# Altium PCB FootSW.PcbDoc
Units mil, origin at the board's own origin, x right, y up, seen from the top; angles counter-clockwise.
Board outline 6141.73 x 1062.99 mil, 2 copper layers (Top Layer, Bottom Layer); 4 components, 6 nets, 30 pads, 0 vias.
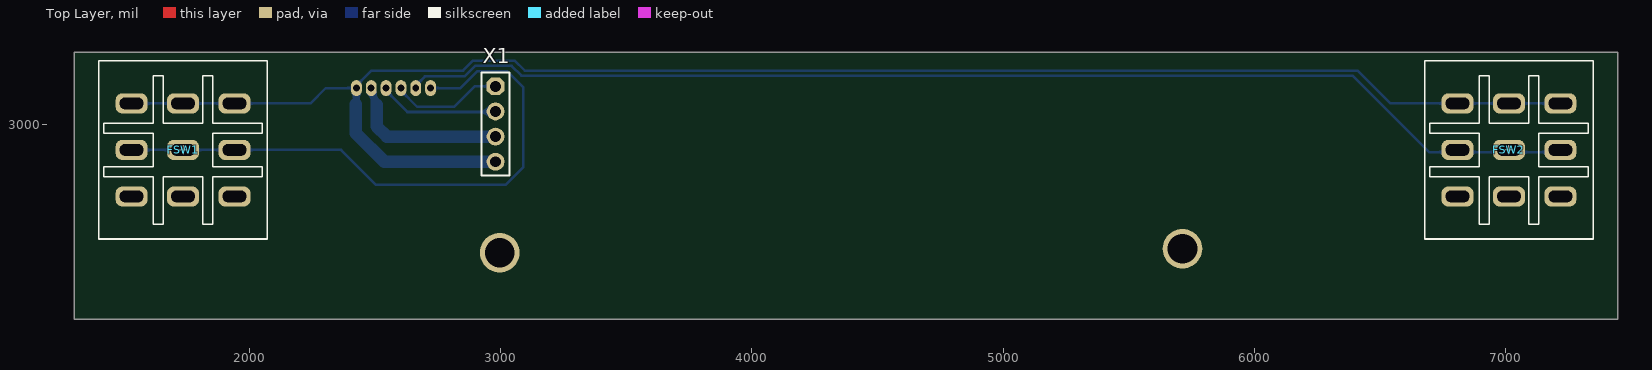
[diagram p0: Top Layer view]
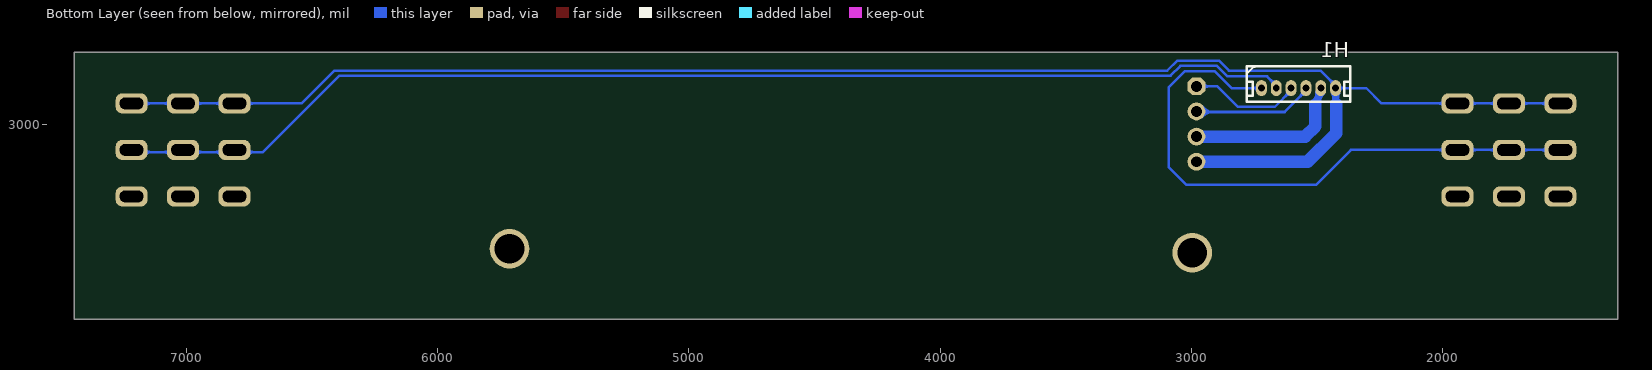
[diagram p1: Bottom Layer view, seen from below]
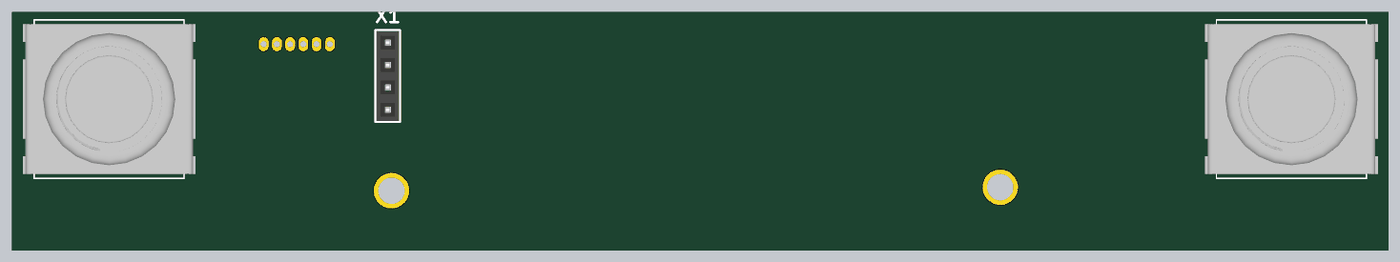
[diagram p2: 3D render of the assembled board from above, using the file's embedded part models]

## Layer stack, top to bottom
Top Solder: solder mask 0.4, Solder Resist, Dk 3.5
Top Layer: signal copper 1.4
Dielectric 1: dielectric 12.6, FR-4, Dk 4.8
Bottom Layer: signal copper 1.4
Bottom Solder: solder mask 0.4, Solder Resist, Dk 3.5

## Board outline
1304.13,2225 1304.13,3287.99 7445.87,3287.99 7445.87,2225

## Design rules (kind name [scope] priority, off if disabled: settings)
Clearance [All] p1: gap=10 ignorepadtopadclearanceinfootprint=FALSE except(0: Arc-Hole Track-Hole SMDPad-Hole THPad-Hole Via-Hole Fill-Hole Poly-Hole Region-Hole Text-Hole)
PolygonConnect [All] p1: connectstyle=Relief reliefconductorwidth=10 reliefentries=4 polygonreliefangle="90 Angle" airgapwidth=10
RoutingVias [All] p1: holewidth=28 width=50 viastyle="Through Hole" minholewidth=28 minwidth=50 maxholewidth=28 maxwidth=50
SolderMaskExpansion [All] p1: expansion=4 istentingtop=FALSE
Width [All] p1: maxlimit=50 minlimit=10 preferedwidth=10
30 further rules are at their usual default settings.

## Components (designator, comment, footprint, x,y, rotation, side; value= is the part's Value field where it differs from the comment)
FSW1 "FootSwitch" FOOTSW 1532.48,3084.05 r270 top
FSW2 "FootSwitch" FOOTSW 6808.07,3084.05 r270 top
H1 "1.5-6A" 1.5-6A 2722.16,3145 r180 bottom
X1 "Connector, 4pin, 2.54mm, 500VAC, 3A" "CON: PBS-4" 2980.54,3002.11 r270 top

## Footprints (in the part's own frame and the unit in brackets; to place one, negate y for a bottom-side part, rotate by r counter-clockwise, add the part's x,y. Pads: shape width x height; smd on the part's side, far side on the other; paste and mask are expansions set on the pad)
1.5-6A [mm] "Pin Header p=1.5mm, 6 pins"
  oval 1.1x1.6 hole 0.7: 1(0,0) 2(1.5,0) 3(3,0) 4(4.5,0) 5(6,0) 6(7.5,0)
  silkscreen extent -1.52,-1.4 9,2.2, body extent -1.4,-1.3 8.9,2.1, height 6
"CON: PBS-4" [mm] "PBS-5"
  oct 1.8x1.8 hole 1.1: 1(-3.81,0)
  round 1.8 hole 1.1: 2(-1.27,0) 3(1.27,0) 4(3.81,0)
  silkscreen extent -5.23,-1.4 5.2,1.4, body extent -5.08,-1.27 5.08,1.27, height 8.4
FOOTSW [mm]
  rrect60% 2x3.2 hole 1.2 slot 2.4 at 90 deg: 1(0,0) 2(4.7,0) 3(9.4,0) 4(0,5.2) 5(4.7,5.2) 6(9.4,5.2) 7(0,10.4) 8(4.7,10.4) 9(9.4,10.4)
  silkscreen extent -4.3,-3.3 13.7,13.7, body extent -3.81,-4.59 13.19,15.01, height 39.54

## Part data
H1: "Pin Header p=1.5mm, 6 pins"
X1: library part PBS-4, CurrentMax=3A, Manufacturer=Connfly, VoltageMax=500VAC, CommentText="\"Разъем\"", helpurl=https://www.chipdip.ru/product/pbs-4, Multichannel=4pin, PartNumber=PBS-4, Pitch=2.54mm, TypeConnector=Connector, ValueManufacturerPartNumber="Connector, 4pin, 2.54mm, 500VAC, 3A"

## Free pads (board coordinates)
  round 157.48 hole 118.11: 1(2997.25,2490.38) 1(5713.75,2505.98)

## Nets (pads, with @x,y where several pads share a name; then routed paths per layer and width w, separated by ;. In a path a pad name is that pad's centre, name@x,y a point inside that pad or via, vN(x,y) a via of type N, cw(c..) or ccw(c..) an arc to the next point about the centre after c; other vN are vias at no path point)
+5: H1.5 X1.3 | length 664.7
  Bottom Layer w25: H1.5@2491.51,3128.77 2491.51,3139.43 H1.5 2485.95,3135.16 2507.17,3077.83
  Bottom Layer w50: 2507.17,3077.83 2507.17,2992.83 2547.89,2952.11 X1.3
FOOT_L: FSW1.2 FSW1.5 FSW1.8 H1.1 | length 2384.2
  Bottom Layer w10: FSW1.2 FSW1.5 FSW1.8 2365.98,2899.02 2505,2760 3020,2760 3090,2830 3090,3149.09 3027.81,3211.28 2907.17,3211.28 2840.89,3145 H1.1
FOOT_R: FSW2.2 FSW2.5 FSW2.8 H1.2 | length 4742.8
  Bottom Layer w10: H1.2 2663.11,3154.84 2699.76,3191.5 2857.15,3191.5 2899.13,3233.47 3044.75,3233.47 3083.22,3195 6390,3195 6695,2890 6808.07,2890 7012.8,2890 7208.5,2890 FSW2.8
GND: FSW1.1 FSW1.4 FSW1.7 FSW2.1 FSW2.4 FSW2.7 H1.6 X1.4 | length 6615.4
  Bottom Layer w10: FSW1.1 FSW1.4 FSW1.7 2244.05,3084.05 2305,3145 H1.6 2426.89,3154.84 2487.05,3215 2851.21,3215 2891.06,3254.85 3056.85,3254.85 3096.7,3215 6410,3215 6540.95,3084.05 FSW2.1 FSW2.4 FSW2.7
  Bottom Layer w25: 2425,3080 2426.89,3081.89 H1.6
  Bottom Layer w50: 2425,3080 2425,2965 2537.89,2852.11 X1.4
SCL\: H1.4 X1.2 | length 481.5
  Bottom Layer w10: H1.4 2545,3135.16 2630.16,3050 2978.43,3050 X1.2
SDA: H1.3 X1.1 | length 447.3
  Bottom Layer w10: H1.3 2604.05,3135.16 2669.21,3070 2815,3070 2897.11,3152.11 X1.1
pads on no net: FSW1.3 FSW1.6 FSW1.9 FSW2.3 FSW2.6 FSW2.9

## Silkscreen, mask and mechanical layers (free items; w line width, h text height)
outline:
  the board outline again, w1
Mechanical 4:
  circle w0.5: c2991.38,3513.99 r49.21
  circle w0.5: c2997.25,2490.38 r49.21
  circle w0.5: c5707.87,3529.59 r49.21
  circle w0.5: c5713.75,2505.98 r49.21
  lines w0.5: 1304.13,3287.99 2170.28,3287.99 2170.28,2579.33 6579.72,2579.33 6579.72,3287.99 7445.87,3287.99 ; 1603.58,3032.64 cw(c1737.2,2899.02) 1870.83,2765.39 ; 1721.46,2899.02 1752.95,2899.02 ; 1737.2,2710.04 cw(c1737.2,2899.02) 1737.2,3087.99 ; 1737.2,2883.27 1737.2,2914.76 ; 2981.51,2490.38 3013,2490.38 ; 2997.25,2474.64 2997.25,2506.13 ; 4375,2225 4375,2575.02 ; 5698,2505.98 5729.49,2505.98 ; 5713.75,2490.23 5713.75,2521.73 ; 6997.05,2899.02 7028.54,2899.02 ; 7012.8,2883.27 7012.8,2914.76 ; 2934.09,3206.57 3026.99,2797.65 ; 2934.09,3206.57 3024.64,3207.09 ; 2934.09,3206.57 2936.44,2797.13 ; 2936.44,2797.13 3024.64,3207.09 ; 2936.44,2797.13 3026.99,2797.65 ; 3024.64,3207.09 3026.99,2797.65 ; 1382.87,2564.37 1382.87,3233.66 2091.54,3233.66 2091.54,2564.37 1382.87,2564.37 ; 1382.87,2623.42 ccw(c1441.93,2623.42) 1441.93,2564.37 2032.48,2564.37 ccw(c2032.48,2623.42) 2091.54,2623.42 2091.54,3174.61 ccw(c2032.48,3174.61) 2032.48,3233.66 1441.93,3233.66 ccw(c1441.93,3174.61) 1382.87,3174.61 1382.87,2623.42 ; 1422.24,2792.72 1422.24,2832.09 1619.09,2832.09 1619.09,2965.94 1422.24,2965.94 1422.24,3005.31 1619.09,3005.31 1619.09,3194.29 1658.46,3194.29 1658.46,3005.31 1815.94,3005.31 1815.94,3194.29 1855.32,3194.29 1855.32,3005.31 2052.17,3005.31 2052.17,2965.94 1855.32,2965.94 1855.32,2832.09 2052.17,2832.09 2052.17,2792.72 1855.32,2792.72 1855.32,2603.74 1815.94,2603.74 1815.94,2792.72 1658.46,2792.72 1658.46,2603.74 1619.09,2603.74 1619.09,2792.72 1422.24,2792.72 ; 1441.93,2899.02 cw(c1737.2,2899.02) 1528.41,3107.81 cw(c1737.2,2899.02) 1441.93,2899.02 ; 2892.39,3611.85 2899.4,2391.39 5812.73,2408.12 5805.73,3628.58 2892.39,3611.85 ; 6658.46,2564.37 7367.13,2564.37 7367.13,3233.66 6658.46,3233.66 6658.46,2564.37 ; 6658.46,2623.42 ccw(c6717.52,2623.42) 6717.52,2564.37 7308.07,2564.37 ccw(c7308.07,2623.42) 7367.13,2623.42 7367.13,3174.61 ccw(c7308.07,3174.61) 7308.07,3233.66 6717.52,3233.66 ccw(c6717.52,3174.61) 6658.46,3174.61 6658.46,2623.42 ; 6697.83,2792.72 6697.83,2832.09 6894.69,2832.09 6894.69,2965.94 6697.83,2965.94 6697.83,3005.31 6894.69,3005.31 6894.69,3194.29 6934.06,3194.29 6934.06,3005.31 7091.54,3005.31 7091.54,3194.29 7130.91,3194.29 7130.91,3005.31 7327.76,3005.31 7327.76,2965.94 7130.91,2965.94 7130.91,2832.09 7327.76,2832.09 7327.76,2792.72 7130.91,2792.72 7130.91,2603.74 7091.54,2603.74 7091.54,2792.72 6934.06,2792.72 6934.06,2603.74 6894.69,2603.74 6894.69,2792.72 6697.83,2792.72 ; 7012.8,2710.04 cw(c7012.8,2899.02) 7012.8,3087.99 cw(c7012.8,2899.02) 7012.8,2710.04 ; 7221.59,2690.22 ccw(c7012.8,2899.02) 7308.07,2899.02 ccw(c7012.8,2899.02) 7221.59,2690.22